# EAGLE board ShowStopper REV C (EAGLE 5.00)
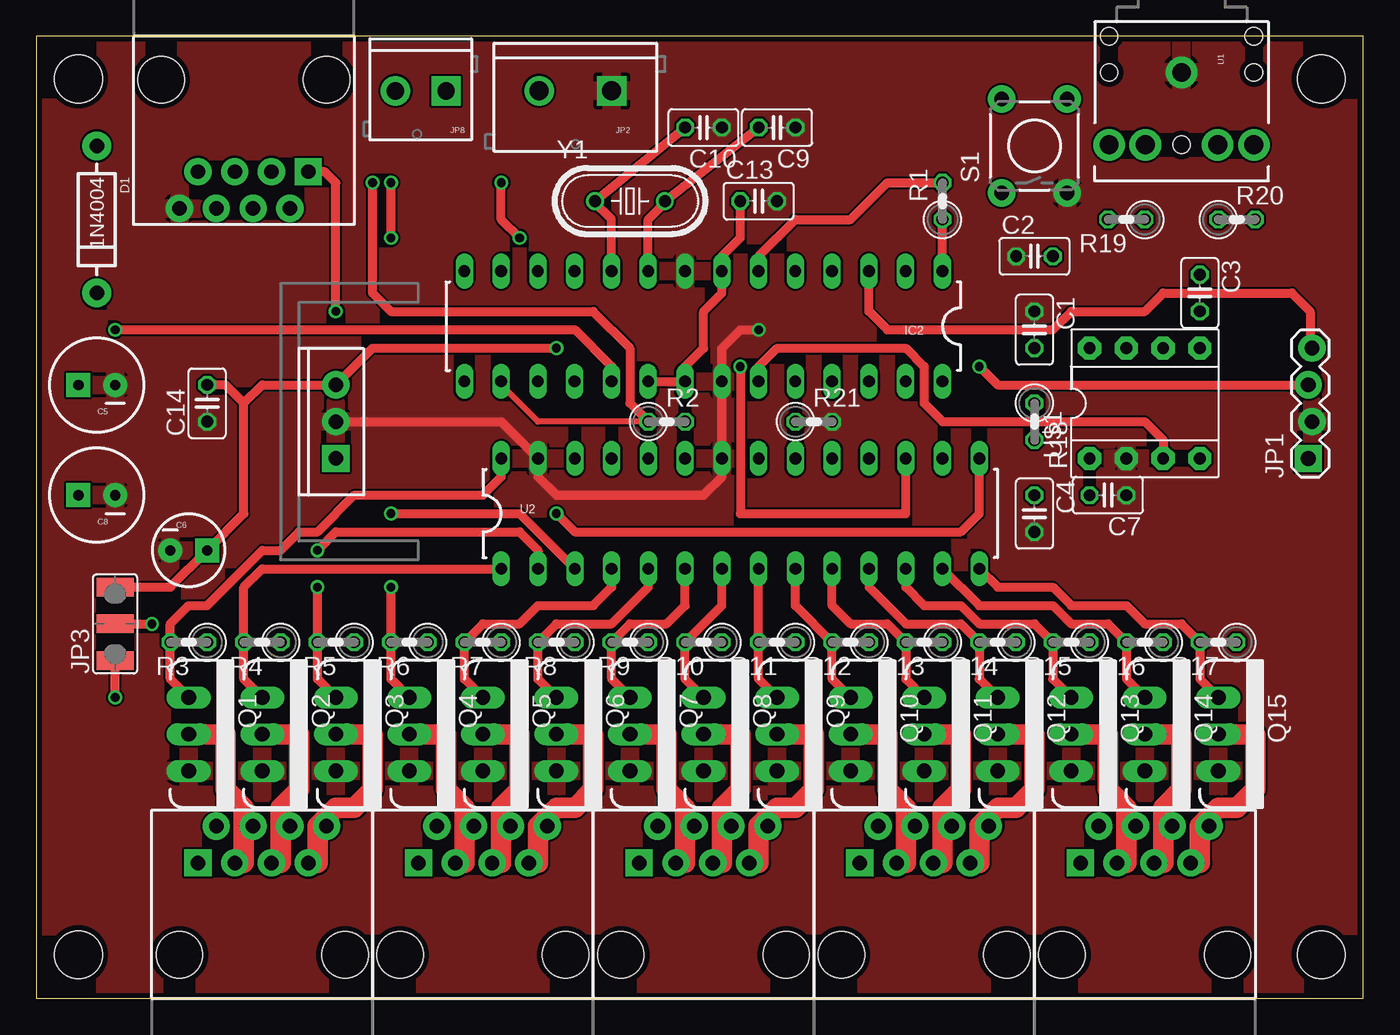
[diagram p0: board, top side]
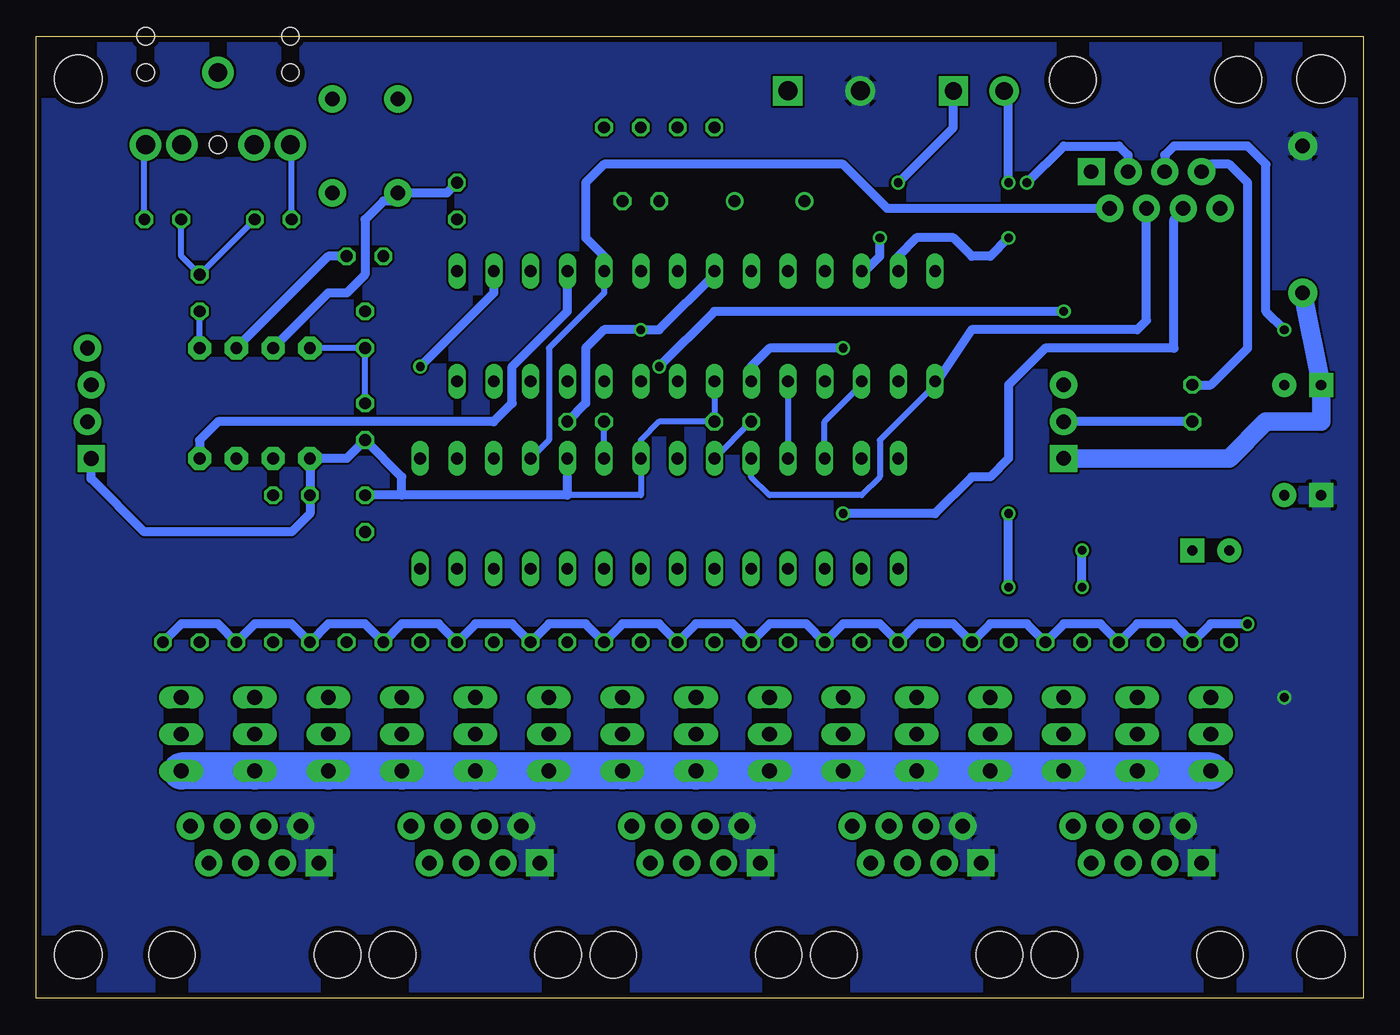
[diagram p1: board, bottom side, seen from below]

Size 91.67 x 66.47 mm. Coordinates in mm from the lower left corner, seen from the top.
Outline: 0,0 91.67,0 91.67,66.47 0,66.47 0,0
Copper layers (1*16): Top 0.0356mm / dielectric 1.5011mm / Bottom 0.0356mm
Design rules "LaenPCBOrder (1)": minimum track width 6mil, minimum drill 13mil, track to track 6mil, track to pad 6mil, pad to pad 6mil, via to via 6mil, smd to smd 6mil, copper to edge 15mil, drill to drill 6mil, minimum pad ring 7mil, minimum via ring 7mil, stop-mask expansion 4mil, vias tented up to drill 0mil, thermal gap 10mil

## Footprints (pad centres in the part's own frame; a part is rotated, then mirrored left to right if it is on the bottom)
C025-025X050 = drill 0.813 octagon: 1 -1.27,0; 2 1.27,0
CPOL-RADIAL-100UF-25V = drill 0.7 pad 1.651 square: 1 1.27,0 | drill 0.7 pad 1.651 round: 2 -1.27,0
CPOL-RADIAL-10UF-25V = drill 0.7 pad 1.651 square: 1 1.27,0 | drill 0.7 pad 1.651 round: 2 -1.27,0
DIODE-1N4001 = drill 1 pad 1.981 round: A -5.08,0; C 5.08,0
RJ45-8 = drill 1 pad 1.88 square: 1 -4.445,6.35 | drill 1 pad 1.88 round: 2 -3.175,8.89; 3 -1.905,6.35; 4 -0.635,8.89; 5 0.635,6.35; 6 1.905,8.89; 7 3.175,6.35; 8 4.445,8.89 | hole 3.2: -5.715,0; 5.715,0
TO220-IGO = drill 1 pad 1.88 round: GND 0,0; OUT 2.54,0 | drill 1 pad 1.88 square: IN -2.54,0
DIL28-3 = drill 0.813 long: 1 -16.51,-3.81; 2 -13.97,-3.81; 3 -11.43,-3.81; 4 -8.89,-3.81; 5 -6.35,-3.81; 6 -3.81,-3.81; 7 -1.27,-3.81; 8 1.27,-3.81; 9 3.81,-3.81; 10 6.35,-3.81; 11 8.89,-3.81; 12 11.43,-3.81; 13 13.97,-3.81; 14 16.51,-3.81; 15 16.51,3.81; 16 13.97,3.81; 17 11.43,3.81; 18 8.89,3.81; 19 6.35,3.81; 20 3.81,3.81; 21 1.27,3.81; 22 -1.27,3.81; 23 -3.81,3.81; 24 -6.35,3.81; 25 -8.89,3.81; 26 -11.43,3.81; 27 -13.97,3.81; 28 -16.51,3.81
1X04_LOCK = drill 1.016 pad 1.88 square: 1 0,0.127 | drill 1.016 pad 1.88 round: 2 2.54,-0.127; 3 5.08,0.127; 4 7.62,-0.127
SCREWTERMINAL-5MM-2 = drill 1.3 pad 2.032 square: 1 0,0 | drill 1.3 pad 2.032 round: 2 5,0
SJ_2W = smd 1.27 x 2.54: 1 -2.54,0; 2 0,0; 3 2.54,0
STAND-OFF = hole 3.302: 0,0
SCREWTERMINAL-3.5MM-2 = drill 1.2 pad 2.032 square: 1 0,0 | drill 1.2 pad 2.032 round: 2 3.5,0
TO220V = drill 1.016 long: 1 -2.54,0; 2 0,0; 3 2.54,0
0207/2V = drill 0.813 octagon: 1 -1.27,0; 2 1.27,0
TACTILE-PTH = drill 1.016 pad 1.88 round: 1 -3.251,2.261; 2 3.251,2.261; 3 -3.251,-2.261; 4 3.251,-2.261
AUDIO-JACK = drill 1.3 pad 2.184 round: RING 5,5; RSH 5,2.5; SLEEVE 0,0; TIP 5,-5; TSH 5,-2.5 | hole 1.2: 0,5; -2.5,5; -2.5,-5; 0,-5; 5,0
DIL08 = drill 0.813 pad 1.6 octagon: 1 -3.81,-3.81; 2 -1.27,-3.81; 3 1.27,-3.81; 4 3.81,-3.81; 5 3.81,3.81; 6 1.27,3.81; 7 -1.27,3.81; 8 -3.81,3.81
HC49U-V = drill 0.813 round: 1 -2.413,0; 2 2.413,0

## Placement (x,y rotation side)
C1  33pf  [C025-025X050]  68.96,46.19 270 top
C2  .1uf  [C025-025X050]  68.96,51.27 0 top
C3  .01uf  [C025-025X050]  80.39,48.73 270 top
C4  .1uf  [C025-025X050]  68.96,33.49 270 top
C5  100uf  [CPOL-RADIAL-100UF-25V]  4.19,42.38 180 top
C6  10uf  [CPOL-RADIAL-10UF-25V]  10.54,30.95 0 top
C7  .1uf  [C025-025X050]  74.04,34.76 180 top
C8  100uf  [CPOL-RADIAL-100UF-25V]  4.19,34.76 180 top
C9  22PF  [C025-025X050]  51.18,60.16 180 top
C10  22PF  [C025-025X050]  46.1,60.16 180 top
C13  .1uf  [C025-025X050]  49.91,55.08 0 top
C14  .1uf  [C025-025X050]  11.81,41.11 90 top
D1  1N4004  [DIODE-1N4001]  4.19,53.81 270 top
EXT  RJ45-8PTH  [RJ45-8]  14.35,63.46 180 top
IC1  LM7805  [TO220-IGO]  20.7,39.84 90 top
IC2  AVR-MEGA8-PPTH  [DIL28-3]  46.09,46.43 180 top
JP1  BT  [1X04_LOCK]  88.01,37.3 90 top
JP2  [SCREWTERMINAL-5MM-2]  39.75,62.7 180 top
JP3  [SJ_2W]  5.46,25.87 90 top
JP4  STAND-OFF  [STAND-OFF]  88.77,63.51 0 top
JP5  STAND-OFF  [STAND-OFF]  88.77,3.01 0 top
JP6  STAND-OFF  [STAND-OFF]  2.92,3.01 0 top
JP7  STAND-OFF  [STAND-OFF]  2.92,63.51 0 top
JP8  [SCREWTERMINAL-3.5MM-2]  28.32,62.7 180 top
Q1  [TO220V]  10.54,18.25 270 top
Q2  [TO220V]  15.62,18.25 270 top
Q3  [TO220V]  20.7,18.25 270 top
Q4  [TO220V]  25.78,18.25 270 top
Q5  [TO220V]  30.86,18.25 270 top
Q6  [TO220V]  35.94,18.25 270 top
Q7  [TO220V]  41.02,18.25 270 top
Q8  [TO220V]  46.1,18.25 270 top
Q9  [TO220V]  51.18,18.25 270 top
Q10  [TO220V]  56.26,18.25 270 top
Q11  [TO220V]  61.34,18.25 270 top
Q12  [TO220V]  66.42,18.25 270 top
Q13  [TO220V]  71.5,18.25 270 top
Q14  [TO220V]  76.58,18.25 270 top
Q15  [TO220V]  81.66,18.25 270 top
R1  10k  [0207/2V]  62.61,55.08 90 top
R2  10k  [0207/2V]  43.56,39.84 0 top
R3  10k  [0207/2V]  10.54,24.6 180 top
R4  10k  [0207/2V]  15.62,24.6 180 top
R5  10k  [0207/2V]  20.7,24.6 180 top
R6  10k  [0207/2V]  25.78,24.6 180 top
R7  10k  [0207/2V]  30.86,24.6 180 top
R8  10k  [0207/2V]  35.94,24.6 180 top
R9  10k  [0207/2V]  41.02,24.6 180 top
R10  10k  [0207/2V]  46.1,24.6 180 top
R11  10k  [0207/2V]  51.18,24.6 180 top
R12  10k  [0207/2V]  56.26,24.6 180 top
R13  10k  [0207/2V]  61.34,24.6 180 top
R14  10k  [0207/2V]  66.42,24.6 180 top
R15  10k  [0207/2V]  71.5,24.6 180 top
R16  10k  [0207/2V]  76.58,24.6 180 top
R17  10k  [0207/2V]  81.66,24.6 180 top
R18  200k  [0207/2V]  68.96,39.84 270 top
R19  22k  [0207/2V]  75.31,53.81 180 top
R20  22k  [0207/2V]  82.93,53.81 0 top
R21  2.2K  [0207/2V]  53.72,39.84 0 top
S1  SWITCH-MOMENTARY-2PTH  [TACTILE-PTH]  68.96,58.89 90 top
U1  AUD0  [AUDIO-JACK]  79.12,63.97 270 top
U2  TLC5940-NT  [DIL28-3]  48.64,33.49 0 top
U$1  MSGEQ7_PTH  [DIL08]  76.58,41.11 0 top
U$3  RJ45-8PTH  [RJ45-8]  15.62,3.01 0 top
U$4  RJ45-8PTH  [RJ45-8]  30.86,3.01 0 top
U$5  RJ45-8PTH  [RJ45-8]  46.1,3.01 0 top
U$6  RJ45-8PTH  [RJ45-8]  61.34,3.01 0 top
U$7  RJ45-8PTH  [RJ45-8]  76.58,3.01 0 top
Y1  XTAL  [HC49U-V]  41.02,55.08 0 top

## Library data of the parts
C1-C4 C7 C9 C10 C13 C14 R1-R21 = resistor
C5 C6 C8 D1 EXT IC1 IC2 JP1-JP8 Q1-Q15 S1 U1 U2 U$1 U$3-U$7 Y1 = SparkFun

## Nets
ANALOG0: IC2.23 U$1.3
BLANK: EXT.3 IC2.16 R2.1 U2.23
GND: C1.1 C2.1 C4.2 C5.2 C6.2 C7.1 C8.2 C9.1 C10.1 C13.2 C14.1 EXT.8 IC1.GND IC2.8 IC2.22 JP1.2 JP2.1 Q1.3 Q2.3 Q3.3 Q4.3 Q5.3 Q6.3 Q7.3 Q8.3 Q9.3 Q10.3 Q11.3 Q12.3 Q13.3 Q14.3 Q15.3 R21.2 S1.3 U1.SLEEVE U2.22 U2.27 U$1.2
GSCLK: EXT.2 IC2.5 U2.18
LEFT: R19.2 U1.TIP
N$1: Q7.2 U$5.3 U$5.4
N$2: Q2.2 U$3.5 U$3.6
N$3: Q3.2 U$3.7 U$3.8
N$4: Q10.2 U$6.3 U$6.4
N$5: Q9.1 R11.2 U2.8
N$6: Q2.1 R4.2 U2.1
N$7: Q3.1 R5.2 U2.2
N$8: Q4.1 R6.2 U2.3
N$9: Q5.2 U$4.5 U$4.6
N$10: Q5.1 R7.2 U2.4
N$11: Q6.1 R8.2 U2.5
N$12: Q7.1 R9.2 U2.6
N$13: Q8.1 R10.2 U2.7
N$14: C9.2 IC2.9 Y1.2
N$15: Q10.1 R12.2 U2.9
N$16: Q11.1 R13.2 U2.10
N$17: Q12.1 R14.2 U2.11
N$18: Q13.1 R15.2 U2.12
N$19: Q14.1 R16.2 U2.13
N$20: Q15.1 R17.2 U2.14
N$21: Q6.2 U$4.7 U$4.8
N$22: Q13.2 U$7.3 U$7.4
N$23: Q8.2 U$5.5 U$5.6
N$24: C1.2 R18.1 U$1.8
N$25: Q9.2 U$5.7 U$5.8
N$26: Q14.2 U$7.5 U$7.6
N$27: Q11.2 U$6.5 U$6.6
N$28: C3.2 U$1.5
N$29: Q12.2 U$6.7 U$6.8
N$30: Q15.2 U$7.7 U$7.8
N$31: Q1.2 U$3.3 U$3.4
N$32: C2.2 U$1.6
N$33: Q4.2 U$4.3 U$4.4
N$34: Q1.1 R3.2 U2.28
N$35: R21.1 U2.20
N$36: C3.1 R19.1 R20.1
N$37: C10.2 IC2.10 Y1.1
N$40: C5.1 D1.C IC1.IN
N$43: IC2.1 R1.1
OUT15: EXT.6 U2.15
PIX_CLOCK: IC2.12 JP8.1
PIX_DATA: IC2.13 JP8.2
RIGHT: R20.2 U1.RING
RST: IC2.6 R1.2 S1.1 U$1.7
RXD: IC2.3 JP1.4
SCK: EXT.5 IC2.19 U2.25
SIN: IC2.17 U2.26
SOUT: EXT.1 U2.17
STROBE: IC2.4 U$1.4
TXD: IC2.2 JP1.3
V+: C8.1 D1.A JP2.2 JP3.1 U$3.1 U$3.2 U$4.1 U$4.2 U$5.1 U$5.2 U$6.1 U$6.2 U$7.1 U$7.2
VCC: C4.1 C6.1 C7.2 C13.1 C14.2 EXT.7 IC1.OUT IC2.7 IC2.20 IC2.21 JP1.1 JP3.3 R2.2 R18.2 U2.19 U2.21 U$1.1
VDD: JP3.2 R3.1 R4.1 R5.1 R6.1 R7.1 R8.1 R9.1 R10.1 R11.1 R12.1 R13.1 R14.1 R15.1 R16.1 R17.1
XLAT: EXT.4 IC2.15 U2.24

## Tracks (layer width: path | path; a pad name or v marks a point on that pad's centre or on a via)
ANALOG0
  Top 0.61: U$1.3 77.85,38.57 76.58,39.84 62.61,39.84 61.34,41.11 61.34,43.65 60.07,44.92 51.18,44.92 49.91,43.65 49.91,42.38 49.9,42.39 IC2.23
BLANK  (via drill 0.6)
  Top 0.406: IC2.16 32.12,42.39 34.67,39.84 R2.1
  Top 0.61: v23.24,56.35 23.24,48.73 24.51,47.46 38.48,47.46 41.02,44.92 41.02,41.11 R2.1
  Bottom 0.406: R2.1 U2.23
  Bottom 0.61: EXT.3 16.25,58.25 16.89,58.89 20.7,58.89 v23.24,56.35
GND  (via drill 0.6)
  Top 0.61: v49.91,46.19 48.64,46.19 47.37,44.92 47.37,42.38 | 47.37,42.38 47.36,42.39 IC2.22 | 47.37,42.38 U2.22 47.37,36.03 46.1,34.76 35.94,34.76 34.67,36.03 U2.27 32.13,39.84 IC1.GND
  Bottom 0.61: C14.1 IC1.GND | R21.2 53.72,41.11 53.72,44.92 52.45,46.19 v49.91,46.19 48.64,46.19 44.82,50.01 IC2.8
  Bottom 2.54: Q1.3 Q2.3 Q3.3 Q4.3 Q5.3 Q6.3 Q7.3 Q8.3 Q9.3 Q10.3 Q11.3 Q12.3 Q13.3 Q14.3 Q15.3
  pour Top: 0.38,66.51 91.82,66.51 91.82,0.47 0.38,0.47
GSCLK
  Bottom 0.406: IC2.5 52.44,48.74 56.26,44.92 56.26,38.57 U2.18
  Bottom 0.61: EXT.2 32.89,54.57 35.94,57.62 52.45,57.62 53.72,56.35 53.72,52.54 52.45,51.27 52.45,50 52.44,50.01 IC2.5
LEFT
  Bottom 0.406: U1.TIP 74.04,58.97 R19.2
N$1
  Top 1.422: Q7.2 43.56,18.25 43.56,14.44 44.83,13.17 44.83,11.9 | 44.83,11.9 44.83,9.36 U$5.3 | 44.83,11.9 U$5.4
N$2
  Top 1.422: Q2.2 18.16,18.25 18.16,14.44 16.89,13.17 16.89,11.9 | 16.89,11.9 16.89,9.36 U$3.5 | 16.89,11.9 U$3.6
N$3
  Top 1.422: Q3.2 23.24,18.25 23.24,14.44 21.97,13.17 20.7,13.17 19.43,11.9 | 19.43,11.9 19.43,9.36 U$3.7 | 19.43,11.9 U$3.8
N$4
  Top 1.422: Q10.2 58.8,18.25 58.8,14.44 60.07,13.17 60.07,11.9 | 60.07,11.9 60.07,9.36 U$6.3 | 60.07,11.9 U$6.4
N$5
  Top 0.61: Q9.1 49.91,22.06 R11.2 U2.8
N$6
  Top 0.61: Q2.1 14.35,22.06 R4.2 14.35,28.41 15.62,29.68 U2.1
N$7  (via drill 0.6)
  Top 0.61: Q3.1 19.43,22.06 R5.2 v19.43,28.41 | U2.2 34.67,30.95 33.4,32.22 20.7,32.22 v19.43,30.95
  Bottom 0.61: v19.43,28.41 v19.43,30.95
N$8  (via drill 0.6)
  Top 0.61: Q4.1 24.51,22.06 R6.2 v24.51,28.41 | U2.3 33.4,33.49 v24.51,33.49
  Bottom 0.61: v24.51,28.41 v24.51,33.49
N$9
  Top 1.422: Q5.2 33.4,18.25 33.4,14.44 32.13,13.17 32.13,11.9 | 32.13,11.9 32.13,9.36 U$4.5 | 32.13,11.9 U$4.6
N$10
  Top 0.61: Q5.1 29.59,22.06 R7.2 30.86,25.87 33.4,25.87 34.67,27.14 38.48,27.14 39.75,28.41 U2.4
N$11
  Top 0.61: Q6.1 34.67,22.06 R8.2 35.94,25.87 39.75,25.87 42.29,28.41 U2.5
N$12
  Top 0.61: Q7.1 39.75,22.06 R9.2 41.02,25.87 43.56,25.87 44.83,27.14 U2.6
N$13
  Top 0.61: Q8.1 44.83,22.06 R10.2 47.37,27.14 U2.7
N$14
  Top 0.61: IC2.9 42.28,53.8 43.56,55.08 Y1.2 C9.2
N$15
  Top 0.61: Q10.1 54.99,22.06 R12.2 52.45,27.14 U2.9
N$16
  Top 0.61: Q11.1 60.07,22.06 R13.2 58.8,25.87 56.26,25.87 54.99,27.14 U2.10
N$17
  Top 0.61: Q12.1 65.15,22.06 R14.2 63.88,25.87 60.07,25.87 57.53,28.41 U2.11
N$18
  Top 0.61: Q13.1 70.23,22.06 R15.2 68.96,25.87 65.15,25.87 63.88,27.14 61.34,27.14 60.07,28.41 U2.12
N$19
  Top 0.61: Q14.1 75.31,22.06 R16.2 74.04,25.87 71.5,25.87 70.23,27.14 65.15,27.14 U2.13
N$20
  Top 0.61: Q15.1 80.39,22.06 R17.2 79.12,25.87 76.58,25.87 75.31,27.14 71.5,27.14 70.23,28.41 66.42,28.41 U2.14
N$21
  Top 1.422: Q6.2 38.48,18.25 38.48,14.44 37.21,13.17 35.94,13.17 34.67,11.9 | 34.67,11.9 34.67,9.36 U$4.7 | 34.67,11.9 U$4.8
N$22
  Top 1.422: Q13.2 74.04,18.25 74.04,14.44 75.31,13.17 75.31,11.9 | 75.31,11.9 75.31,9.36 U$7.3 | 75.31,11.9 U$7.4
N$23
  Top 1.422: Q8.2 48.64,18.25 48.64,14.44 47.37,13.17 47.37,11.9 | 47.37,11.9 47.37,9.36 U$5.5 | 47.37,11.9 U$5.6
N$24
  Bottom 0.406: U$1.8 C1.2 R18.1
N$25
  Top 1.422: Q9.2 53.72,18.25 53.72,14.44 52.45,13.17 51.18,13.17 49.91,11.9 | 49.91,11.9 49.91,9.36 U$5.7 | 49.91,11.9 U$5.8
N$26
  Top 1.422: Q14.2 79.12,18.25 79.12,14.44 77.85,13.17 77.85,11.9 | 77.85,11.9 77.85,9.36 U$7.5 | 77.85,11.9 U$7.6
N$27
  Top 1.422: Q11.2 63.88,18.25 63.88,14.44 62.61,13.17 62.61,11.9 | 62.61,11.9 62.61,9.36 U$6.5 | 62.61,11.9 U$6.6
N$28
  Bottom 0.406: U$1.5 C3.2
N$29
  Top 1.422: Q12.2 68.96,18.25 68.96,14.44 67.69,13.17 66.42,13.17 65.15,11.9 | 65.15,11.9 65.15,9.36 U$6.7 | 65.15,11.9 U$6.8
N$30
  Top 1.422: Q15.2 84.2,18.25 84.2,14.44 82.93,13.17 81.66,13.17 80.39,11.9 | 80.39,11.9 80.39,9.36 U$7.7 | 80.39,11.9 U$7.8
N$31
  Top 1.422: Q1.2 13.08,18.25 13.08,14.44 14.35,13.17 14.35,11.9 | 14.35,11.9 14.35,9.36 U$3.3 | 14.35,11.9 U$3.4
N$32
  Bottom 0.61: C2.2 71.5,51.27 U$1.6
N$33
  Top 1.422: Q4.2 28.32,18.25 28.32,14.44 29.59,13.17 29.59,11.9 | 29.59,11.9 29.59,9.36 U$4.3 | 29.59,11.9 U$4.4
N$34
  Top 0.61: Q1.1 9.27,22.06 R3.2 9.27,25.87 10.54,27.14 11.81,27.14 15.62,30.95 16.89,30.95 18.16,32.22 19.43,32.22 21.97,34.76 30.86,34.76 32.13,36.03 U2.28
N$35
  Bottom 0.406: U2.20 R21.1
N$36
  Bottom 0.406: R19.1 C3.1 81.66,51.27 R20.1
N$37
  Top 0.61: IC2.10 39.74,53.82 38.48,55.08 Y1.1 C10.2
N$40
  Bottom 1.27: D1.C C5.1 2.92,39.84 6.73,39.84 9.27,37.3 IC1.IN
N$43
  Top 0.61: 62.61,52.54 62.6,52.53 | IC2.1 62.61,50 | IC2.1 | IC2.1 62.61,52.54 | 62.61,52.54 R1.1
OUT15  (via drill 0.6)
  Top 0.61: U2.15 65.15,33.49 63.88,32.22 37.21,32.22 v35.94,33.49
  Bottom 0.61: v35.94,33.49 29.59,33.49 27.05,36.03 25.78,36.03 24.51,37.3 24.51,42.38 21.97,44.92 13.08,44.92 13.08,53.81 12.44,54.45 EXT.6
PIX_CLOCK  (via drill 0.6)
  Top 0.61: v32.13,56.35 32.13,53.81 v33.4,52.54
  Bottom 0.61: JP8.1 28.32,60.16 v32.13,56.35 | 34.66,50.01 34.67,50 | IC2.12 34.66,50.01 | v33.4,52.54 33.4,51.27 34.66,50.01
PIX_DATA  (via drill 0.6)
  Top 0.61: v24.51,52.54 v24.51,56.35
  Bottom 0.61: JP8.2 24.51,62.7 v24.51,56.35 | v24.51,52.54 25.78,51.27 27.05,51.27 28.32,52.54 30.86,52.54 32.13,51.27 32.13,50 32.12,50.01 IC2.13
RIGHT
  Bottom 0.305: 84.12,53.89 R20.2
  Bottom 0.406: U1.RING 84.2,58.97 R20.2
RST
  Top 0.61: R1.2 58.8,56.35 56.26,53.81 52.45,53.81 49.91,51.27 49.91,50 49.9,50.01 IC2.6
  Bottom 0.61: U$1.7 71.5,48.73 70.23,48.73 68.96,50 68.96,53.81 67.69,55.08 66.42,55.08 66.7,55.36 S1.1 63.32,55.64 R1.2
RXD
  Top 0.61: IC2.3 57.52,47.47 58.8,46.19 70.23,46.19 71.5,47.46 76.58,47.46 77.85,48.73 86.74,48.73 88.01,47.46 88.01,44.92 JP1.4
SCK  (via drill 0.6)
  Top 0.61: v5.46,46.19 37.21,46.19 39.75,43.65 39.75,42.38 39.74,42.39 IC2.19
  Bottom 0.406: IC2.19 39.74,42.39 39.75,42.38 U2.25
  Bottom 0.61: EXT.5 13.71,58.25 13.08,58.89 8,58.89 6.73,57.62 6.73,47.46 v5.46,46.19
SIN
  Bottom 0.406: IC2.17 34.66,42.39 37.21,39.84 U2.26
SOUT  (via drill 0.6)
  Top 0.61: v48.64,43.65 48.64,33.49 60.07,33.49 U2.17 | EXT.1 19.93,57.11 20.7,56.35 v20.7,47.46
  Bottom 0.61: v20.7,47.46 44.83,47.46 v48.64,43.65
STROBE
  Bottom 0.61: IC2.4 54.98,47.47 58.8,43.65 58.8,41.11 60.07,39.84 79.12,39.84 80.39,38.57 U$1.4
TXD  (via drill 0.6)
  Top 0.61: JP1.3 66.42,42.38 v65.15,43.65
  Bottom 0.61: v65.15,43.65 60.07,48.73 60.07,50 60.06,50.01 IC2.2
V+  (via drill 0.6)
  Top 0.61: v5.46,20.79 JP3.1
  pour Bottom: 0.38,66.51 91.82,66.51 91.82,0.47 0.38,0.47
VCC  (via drill 0.6)
  Top 0.61: 44.82,42.39 44.83,42.38 | 44.82,42.39 IC2.21 44.82,43.64 46.1,44.92 46.1,47.46 47.37,48.73 47.37,50 | IC2.20 44.58,42.62 44.82,42.39 | C13.1 48.64,52.54 47.37,51.27 47.37,50 | 47.37,50 47.36,50.01 IC2.7 | C14.2 13.08,42.38 14.35,41.11 | 14.35,41.11 14.35,33.49 C6.1 9.27,28.41 JP3.3 | 14.35,41.11 15.62,42.38 IC1.OUT 23.24,44.92 v35.94,44.92
  Bottom 0.406: IC2.21 44.82,42.39 44.83,42.38 R2.2 48.64,39.84 49.91,38.57 U2.21 49.91,34.76 54.99,34.76 | 54.99,36.03 U2.19
  Bottom 0.61: C14.2 10.54,42.38 8,44.92 8,56.35 9.27,57.62 10.54,57.62 11.04,57.11 EXT.7 | JP1.1 87.88,35.9 84.2,32.22 74.04,32.22 72.77,33.49 C7.2 U$1.1 70.23,37.3 R18.2 66.42,36.03 66.42,34.76 | 66.42,34.76 54.99,34.76 54.99,36.03 | v35.94,44.92 41.02,44.92 42.29,43.65 42.29,42.38 42.28,42.39 IC2.20 | 66.42,34.76 C4.1
VDD  (via drill 0.6)
  Top 0.61: JP3.2 v8,25.87
  Bottom 0.61: R17.1 81.66,25.87 79.12,25.87 R16.1 76.58,25.87 74.04,25.87 R15.1 71.5,25.87 68.96,25.87 R14.1 66.42,25.87 63.88,25.87 R13.1 61.34,25.87 58.8,25.87 R12.1 56.26,25.87 53.72,25.87 R11.1 51.18,25.87 48.64,25.87 R10.1 46.1,25.87 43.56,25.87 R9.1 41.02,25.87 38.48,25.87 R8.1 35.94,25.87 33.4,25.87 R7.1 30.86,25.87 28.32,25.87 R6.1 25.78,25.87 23.24,25.87 R5.1 20.7,25.87 18.16,25.87 R4.1 15.62,25.87 13.08,25.87 R3.1 10.54,25.87 v8,25.87
XLAT
  Bottom 0.406: U2.24 42.29,36.03 41.02,34.76 34.67,34.76 33.4,36.03 33.4,38.57 29.59,42.38
  Bottom 0.61: EXT.4 14.98,46.82 15.62,46.19 27.05,46.19 29.59,42.38 29.58,42.39 IC2.15